# Altium PCB Z1.PcbDoc (part 1 of 2)
Units mm, origin at the board's own origin, x right, y up, seen from the top; angles counter-clockwise.
Board outline 56.7 x 34.49 mm, 4 copper layers (Top Layer, MidLayer1, MidLayer2, Bottom Layer), stack 1 mm thick; 106 components, 129 nets, 520 pads, 189 vias.
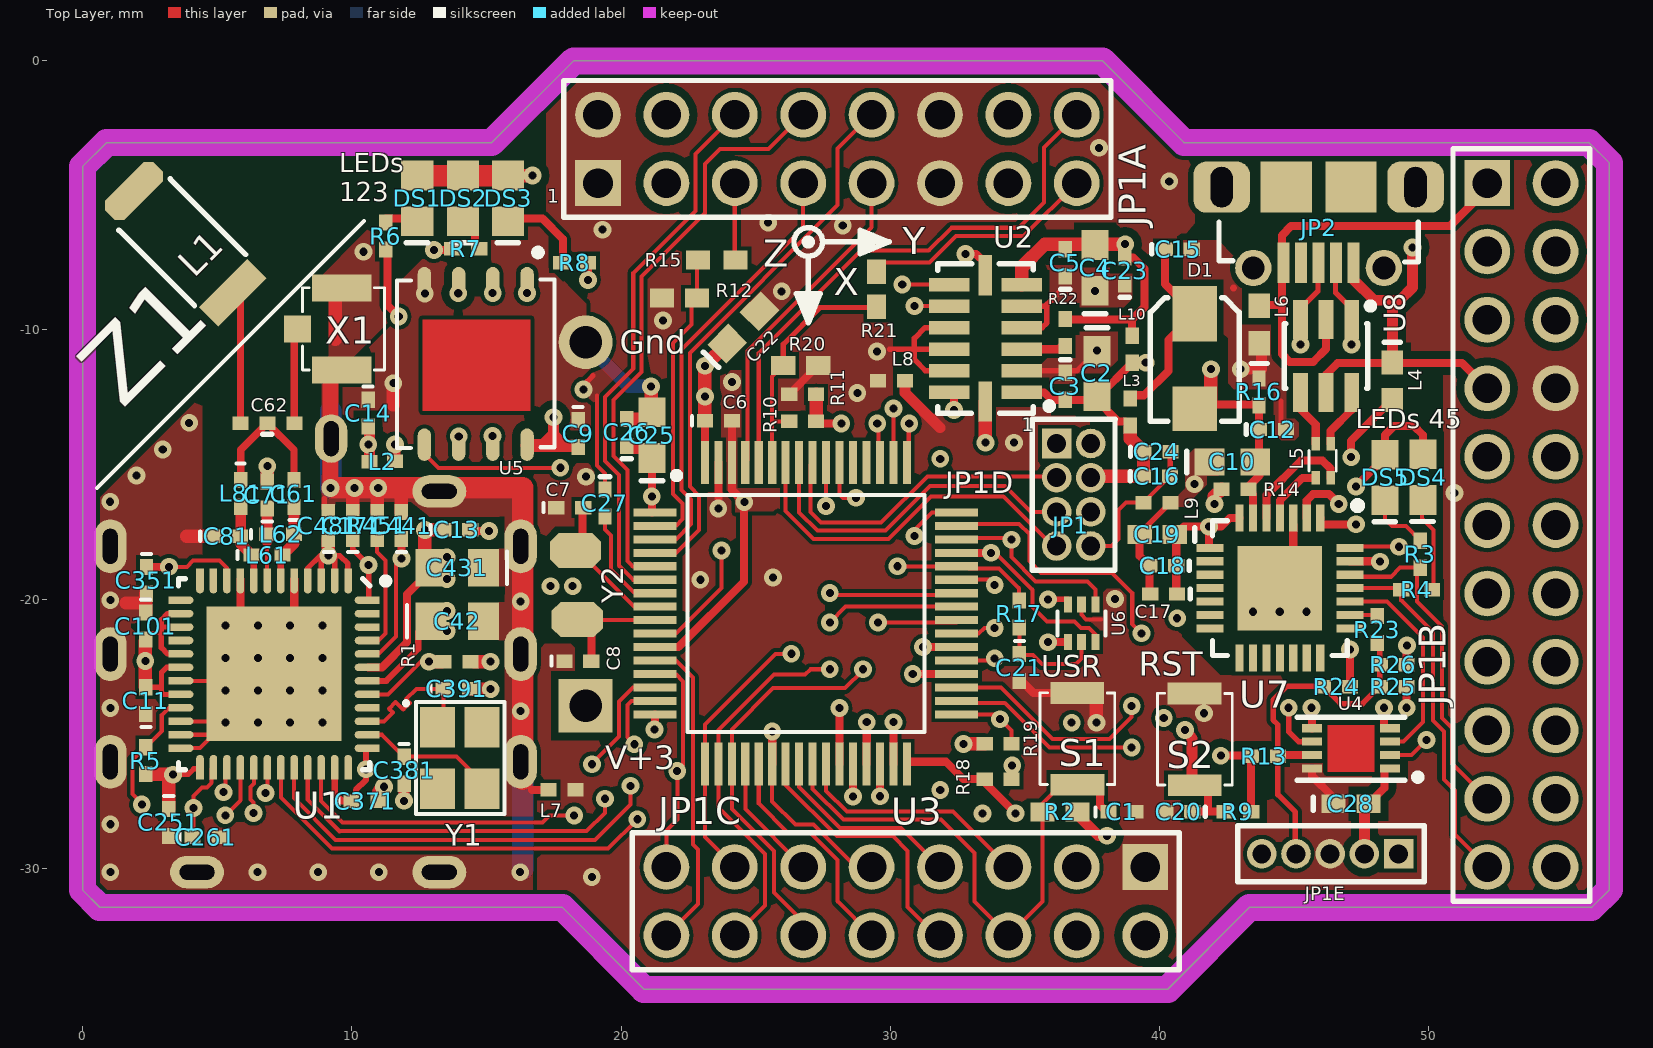
[diagram p0: Top Layer view]
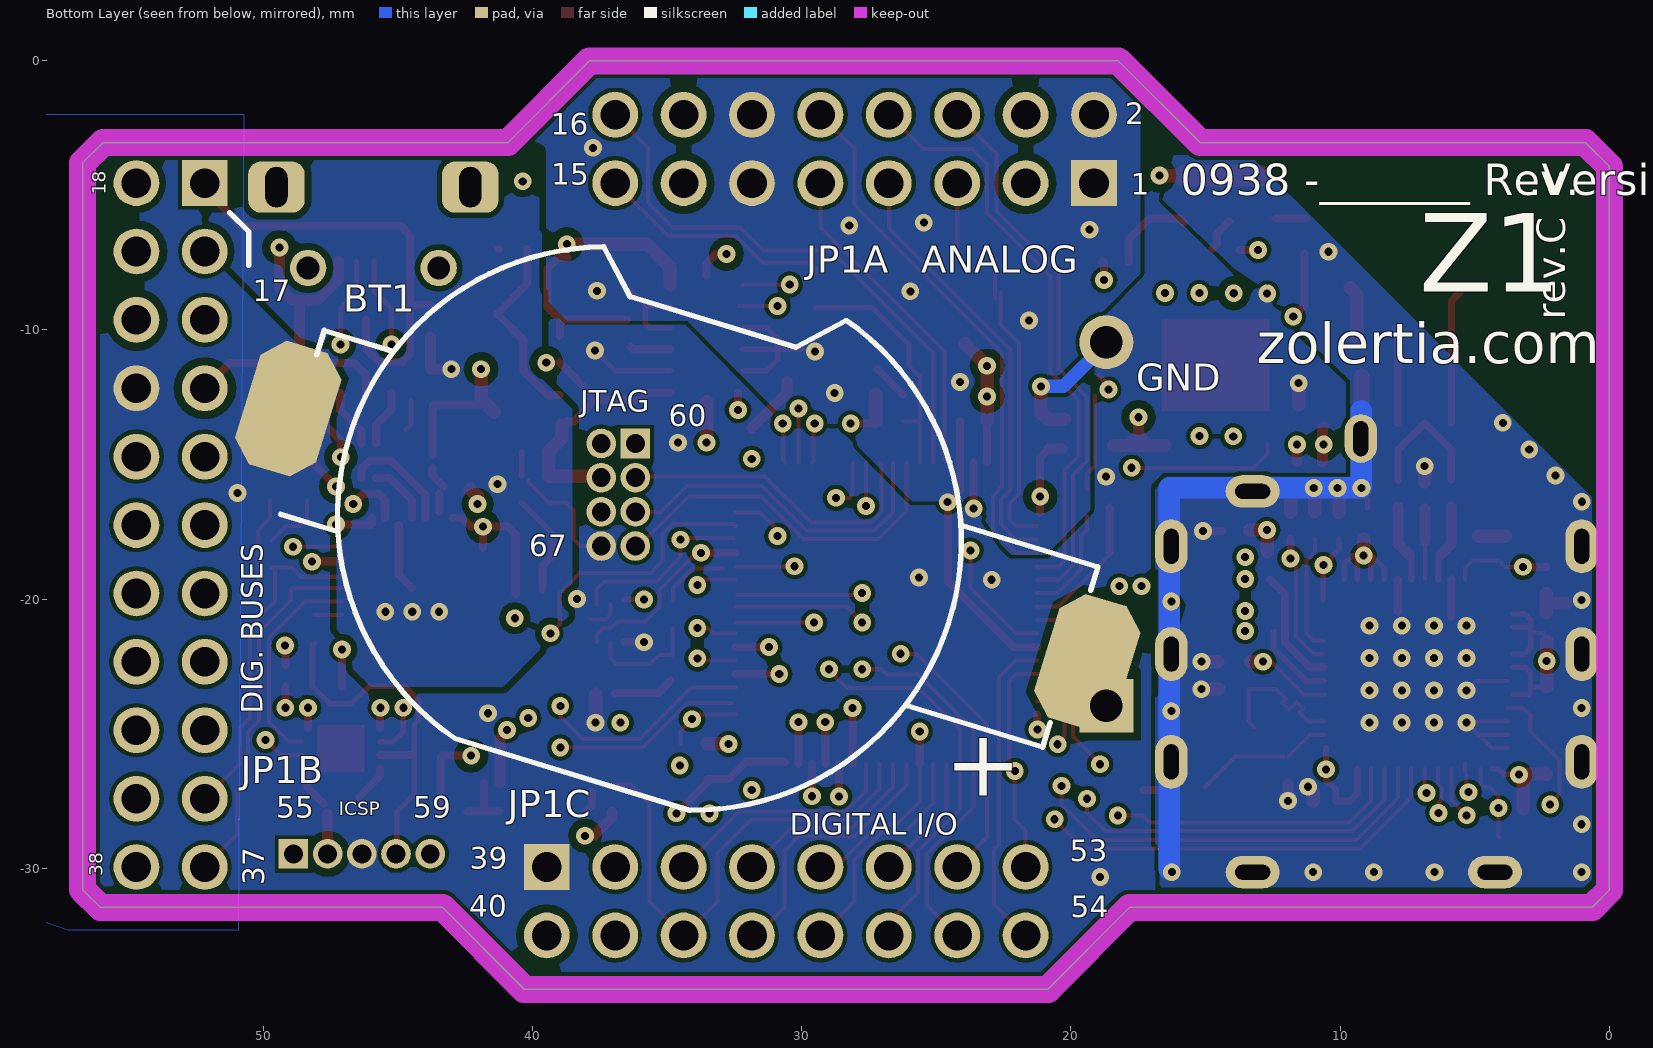
[diagram p1: Bottom Layer view, seen from below]
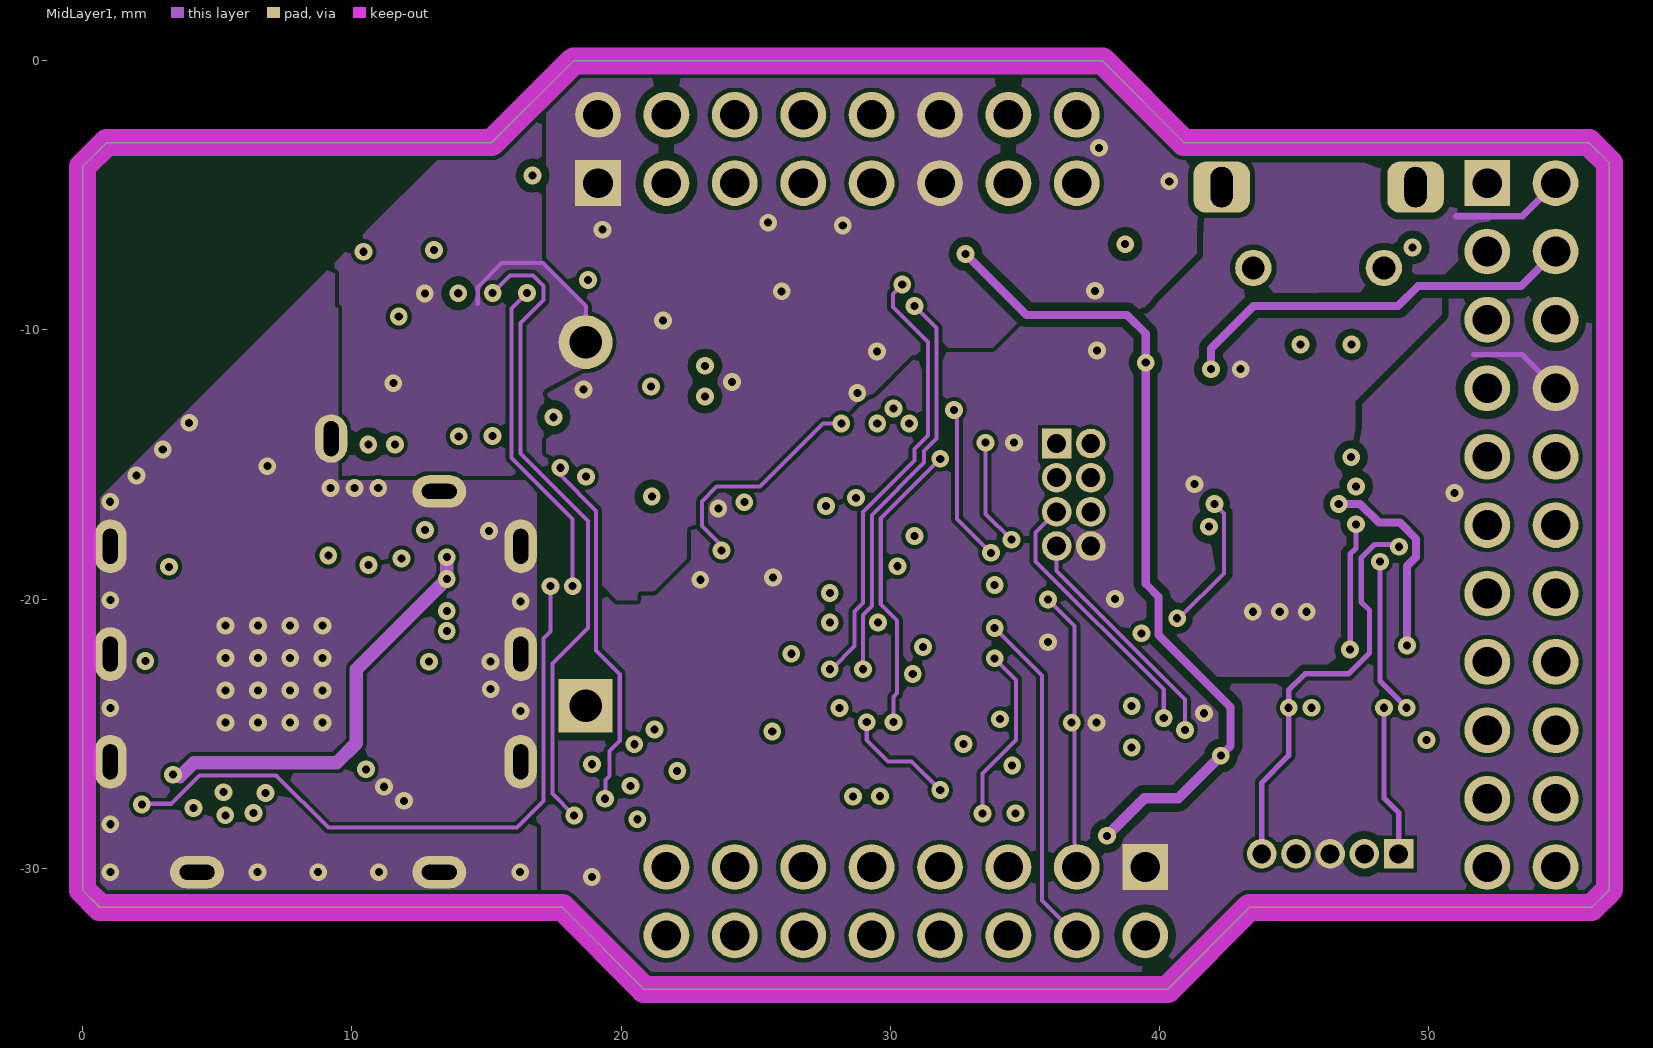
[diagram p2: MidLayer1]
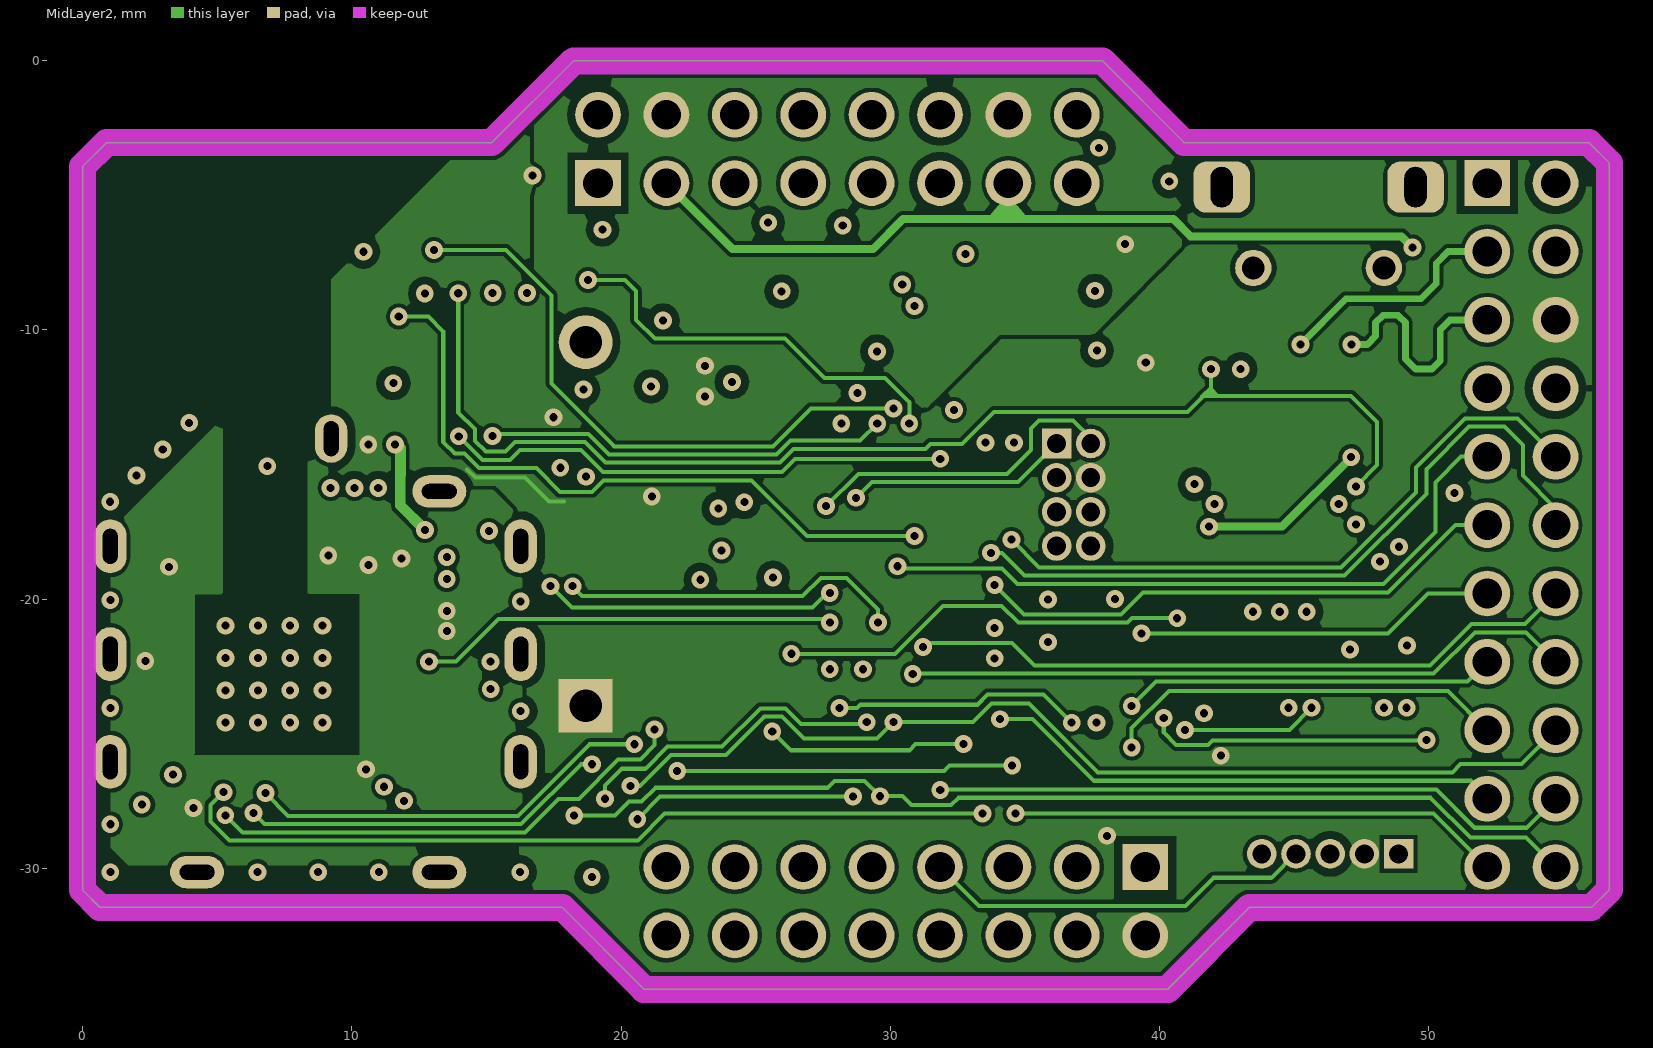
[diagram p3: MidLayer2]

## Layer stack, top to bottom
Top Layer: signal copper 0.035
Dielectric: prepreg 0.18, FR-4, Dk 4.8
MidLayer1: signal copper 0.035
Dielectric: core 0.5, FR-4, Dk 4.8
MidLayer2: signal copper 0.035
Dielectric: prepreg 0.18, FR-4, Dk 4.8
Bottom Layer: signal copper 0.035

## Board outline
0,-30.798 0.64,-31.438 0.63,-31.448 17.822,-31.448 20.84,-34.478 20.84,-34.488 40.3,-34.488 43.334,-31.442 43.334,-31.448 56.03,-31.448 56.035,-31.453 56.7,-30.788 56.7,-3.808 55.932,-3.04 55.925,-3.048 40.893,-3.048 40.901,-3.039 37.87,-0.008 18.256,-0.008 18.247,0.001 15.189,-3.048 0.87,-3.048 0.88,-3.058 0,-3.938 0,-5.704

## Design rules (kind name [scope] priority, off if disabled: settings)
AcuteAngle [All] p1: minimum=4.50000000000000E+0001
Clearance "JP2-2 Clearance constraint" [(ObjectKind = 'Pad') And (Layer = 'MultiLayer') And (Component = 'JP2') And (Name = 'JP2-7')] p1: gap=0.2
Clearance "KeppOutLayer Line Constraint" [(ObjectKind = 'Track') And (Layer = 'KeepOutLayer') And (X1 = '40.90138') And (Y1 = '-3.03938') And (X2 = '55.93138') And (Y2 = '-3.03938')] p2: gap=0.15
Clearance Clearance_1 [(ObjectKind = 'Pad') And (Net = 'DGND') And (Name = 'L9-2') OR (ObjectKind = 'Pad') And (Component = 'C19') And (Name = 'C19-1') vs (ObjectKind = 'Track') And (Net = 'CPDGND') And (X1 = '39.2811') And (Y1 = '-17.5319') And (X2 = '40.4') And (Y2 = '-16.413')] p3: gap=0.15
Clearance "C16 and L9 Clearance with Track" [(ObjectKind = 'Pad') And (Layer = 'Top Layer') And (Net = 'D+3V') And (Component = 'C16') And (Name = 'C16-1') Or (ObjectKind = 'Pad') And (Net = 'CPDGND') And (Name = 'L9-1') vs (ObjectKind = 'Track') And (Layer = 'Top Layer') And (Net = 'DGND') And (X1 = '39.4') And (Y1 = '-16.413') And (X2 = '40.156') And (Y2 = '-15.657')] p4: gap=0.15
Clearance "L9 Rules" [(ObjectKind = 'Pad') And (Name = 'L9-2') vs (ObjectKind = 'Pad') And (Name = 'L9-1')] p5: gap=0.15
Clearance "CP2102 - Clearance" [(Net = 'NetL5_3') OR (Net = 'CPRI') vs Net = 'CPDGND'] p6: gap=0.15
Clearance "U3 - Betwwen A+3V and AGND" [(ObjectKind = 'Pad') And (Layer = 'Top Layer') And (Net = 'ADC+3V') And (Component = 'U3') And (Name = 'U3-64')  OR (ObjectKind = 'Track') And (Layer = 'Top Layer') And (Net = 'ADC+3V') And (X1 = '23.11') And (Y1 = '-14.92901') And (X2 = '23.112') And (Y2 = '-13.378') And (Width = '0.3') vs (ObjectKind = 'Pad') And (Layer = 'Top Layer') And (Net = 'DGND') And (Component = 'U3') And (Name = 'U3-63')  OR (ObjectKind = 'Track') And (Layer = 'Top Layer') And (Net = 'DGND') And (X1 = '23.61') And (Y1 = '-16.638') And (X2 = '23.61') And (Y2 = '-14.92901') And (Width = '0.3')] p7: gap=0.15
Clearance "Between JP1-PIC DGND-D+3V" [(ObjectKind = 'Pad') And (Layer = 'MultiLayer') And (Net = 'DGND') And (Component = 'JP1') And (Name = 'JP1-57') vs (ObjectKind = 'Pad') And (Layer = 'MultiLayer') And (Net = 'D+3V') And (Component = 'JP1') And (Name = 'JP1-56')] p8: gap=0.15
Clearance "Between A+5V,ADC+3V,D+3V and DGOND,ADCGND,CPGND" [InNet('D+3V') OR InNet('D+5V') OR  InNet('USB+5V') OR InNet('CPD+3.3V') OR InNet('ADC+3V') OR InNet('DP+5V') vs InNet('DGND') OR InNet('DRFGND') OR InNet('CPDGND') OR InNet('USBGND') OR InNet('ADCGND')] p9: gap=0.3
Clearance "In Component C9 to ADCGND" [(InComponent('C9-2') AND InNet('D+3V')) vs InNet(ADCGND) And OnLayer(OnTop)] p10: gap=0.15
Clearance "Between D+1.8 and RFGND" [InNet('D+1.8V') vs InNet('RFGND')] p11: gap=0.2
Clearance "In Power Lines and DGND" [(InNetClass('Power Lines') AND OnLayer('Top Layer')) vs InNet('DGND') AND InNet('AGND') AND InNet('CPGND')] p12: gap=0.3
Clearance "Belong CR2032" [(HasFootprint('CR2032 - 796136-1'))] p13: gap=0.254
Clearance Poly_TOP_DGND [InNet('DGND') vs (HasFootprint('ABS07-32.768KHZ-7-T'))] p14: gap=0.254
Clearance "CPD_GND with All other points" [InNet('CPDGND')] p15: gap=0.254
Clearance [All] p16: gap=0.15
ComponentClearance [All] p1: gap=-100 collisioncheckmode=3 verticalgap=-100 showdistances=FALSE
DiffPairsRouting "USB Net N_P" [InNet('D_P')] p1: maxlimit=5 minlimit=0.15 mostfreqgap=0.254 maxuncoupledlength=12.7
DiffPairsRouting "USB Net D_N" [InNet('D_N')] p2: maxlimit=5 minlimit=0.15 mostfreqgap=0.2 maxuncoupledlength=12.7
DiffPairsRouting "RF Net RF_P" [InNet('RF_P')] p3: maxlimit=0.5 minlimit=0.15 mostfreqgap=0.254 toplayer_prefgap=0.2 midlayer1_mingap=0.254 midlayer1_maxgap=0.254 midlayer2_mingap=0.254 midlayer2_maxgap=0.254 bottomlayer_prefgap=0.2 maxuncoupledlength=12.7
DiffPairsRouting "RF Net RF_N" [InNet('RF_N')] p4: maxlimit=0.5 minlimit=0.15 mostfreqgap=0.254 toplayer_prefgap=0.2 midlayer1_mingap=0.254 midlayer1_maxgap=0.254 midlayer2_mingap=0.254 midlayer2_maxgap=0.254 bottomlayer_prefgap=0.2 maxuncoupledlength=12.7
DiffPairsRouting "XTAL32K Net XOSC16_P" [InNet('XOSC16_P')] p5: maxlimit=0.5 minlimit=0.15 mostfreqgap=0.254 toplayer_prefgap=0.2 midlayer1_mingap=0.254 midlayer1_maxgap=0.254 midlayer2_mingap=0.254 midlayer2_maxgap=0.254 bottomlayer_prefgap=0.2 maxuncoupledlength=12.7
DiffPairsRouting "XTAL32K Net XOSC16_N" [InNet('XOSC16_N')] p6: maxlimit=0.5 minlimit=0.15 mostfreqgap=0.254 toplayer_prefgap=0.2 midlayer1_mingap=0.254 midlayer1_maxgap=0.254 midlayer2_mingap=0.254 midlayer2_maxgap=0.254 bottomlayer_prefgap=0.2 maxuncoupledlength=12.7
DiffPairsRouting [All] p7: maxlimit=5 minlimit=0.15 mostfreqgap=0.2 maxuncoupledlength=12.7
HoleSize [All] p1: absolutevalues=TRUE maxlimit=2.54 minlimit=0.025 maxpercent=80.000 minpercent=20.000
LayerPairs [All] p1: enforce=FALSE
Length "InNet('D_N') Or InNet('D_P')_1" [InNet('D_N') Or InNet('D_P')] p1: maxlimit=12.283 minlimit=0
Length "InNet('D_N') Or InNet('D_P')" [InNet('D_N') Or InNet('D_P')] p2: maxlimit=12.283 minlimit=0
MinimumAnnularRing [All] p1: minimumring=0.18
PlaneClearance [All] p1: clearance=0.35
PlaneConnect "Schematic Power Plane Connect Style" [InNet('USB+5V')] p1: planeconnectstyle=Relief reliefexpansion=0.4 reliefentries=4 reliefconductorwidth=0.2 reliefairgap=0.2
PlaneConnect [All] p2: planeconnectstyle=Relief reliefexpansion=0.3 reliefentries=4 reliefconductorwidth=0.2 reliefairgap=0.2
PolygonConnect [All] p1: connectstyle=Direct reliefconductorwidth=0.2 reliefentries=4 polygonreliefangle="90 Angle"
RoutingCorners [All] p1: cornerstyle=45-Degree minsetback=1.27 maxsetback=1.27
RoutingPriority [All] p1: routingpriority=1
RoutingVias [All] p1: holewidth=0.3 width=0.66 viastyle="Through Hole" minholewidth=0.3 minwidth=0.3 maxholewidth=1 maxwidth=1
ShortCircuit [OnLayer('Keep-Out Layer')] p1: allowed=TRUE
SolderMaskExpansion MSP430_Expansion [(InComponent('U3'))] p1: expansion=0.12
SolderMaskExpansion PIC_Expansion [(InComponent('U4'))] p2: expansion=0.12
SolderMaskExpansion CP2102_Expansion [(InComponent('U7'))] p3: expansion=0.12
SolderMaskExpansion CC2420_Expansion [(InComponent('U1'))] p4: expansion=0.12
SolderMaskExpansion [All] p5: expansion=0.1
TestPointUsage [All] p1: valid=0 allowmultiple=FALSE
Testpoint [All] p1: side=9 testpointundercomponent=TRUE minsize=1 maxsize=2.54 preferedsize=1.524 minholesize=0 maxholesize=1.016 preferedholesize=0.813 testpointgrid=0 style=308 order=0123456789
Width "Schematic Width Constraint_6" [InNet('D_P')] p1: maxlimit=0.85 minlimit=0.15 preferedwidth=0.2
Width "Schematic Width Constraint_4" [InNet('D_N')] p2: maxlimit=0.8 minlimit=0.15 preferedwidth=0.2
Width "Schematic Width Constraint_2" [InNet('CERAMIC ANTENNA')] p3: maxlimit=3 minlimit=0.01 preferedwidth=0.254 impedancedriven=TRUE minimp=50.000000 maximp=50.000000 favimp=50.000000
Width "Schematic Width Constraint_3" [InNet('U.FL ANTENNA')] p4: maxlimit=3 minlimit=0.01 preferedwidth=0.254 impedancedriven=TRUE minimp=50.000000 maximp=50.000000 favimp=50.000000
Width "Schematic Width Constraint_5" [InNet('NetC61_2')] p5: maxlimit=3 minlimit=0.01 preferedwidth=0.254 impedancedriven=TRUE minimp=50.000000 maximp=50.000000 favimp=50.000000
Width "Net D+3.3V" [InNet('D+3.3V')] p6: maxlimit=2 minlimit=0.1 preferedwidth=0.5
Width "Schematic Width Constraint" [InNet('USB+5V')] p7: maxlimit=0.4 minlimit=0.3 preferedwidth=0.3
Width "Schematic Width Constraint_1" [InNet('DP+5V')] p8: maxlimit=1 minlimit=0.3 preferedwidth=0.3
Width [All] p9: maxlimit=5 minlimit=0.15 preferedwidth=0.2
10 further rules are at their usual default settings.

## Classes and differential pairs
net class X1_Nets: DRFGND "U.FL ANTENNA"
net class U2_Nets: ADC+3V ADCGND D+3V DGND I2C.SCL I2C.SDA INT1 INT2 NetR22_1
net class R451_Nets: DRFGND NetR451_1
net class R22_Nets: ADC+3V NetR22_1
net class R20_Nets: AD_0 ADCGND
net class R16_Nets: CPD+3.3V CPDGND
net class R13_Nets: D+3V GP0/ICSPDAT
net class R12_Nets: AD_3 ADCGND
net class R11_Nets: ADCGND VEREF+/DAC0
net class R9_Nets: D+3V GP2/T0CKI
net class R5_Nets: DRF+3V P4.6/TB6
net class R2_Nets: D+3V P2.5/ROSC/CA5
net class R1_Nets: DRFGND P4.5/TB5
net class L10_Nets: ADC+3V D+3V
net class L9_Nets: CPDGND DGND
net class L8_Nets: ADCGND DGND
net class L7_Nets: DGND DRFGND
net class L6_Nets: CPDGND USBGND
net class L3_Nets: D+3V NetC15_1
net class L2_Nets: D+3V DRF+3V
net class DS3_Nets: D+3V NetDS3_2
net class DS2_Nets: D+3V NetDS2_2
net class DS1_Nets: D+3V NetDS1_2
net class C481_Nets: D+1.8V DRFGND
net class C441_Nets: D+1.8V DRFGND
net class C431_Nets: DRF+3V DRFGND
net class C391_Nets: DRFGND XOSC16_N
net class C381_Nets: DRFGND XOSC16_P
net class C371_Nets: D+1.8V DRFGND
net class C351_Nets: D+1.8V DRFGND
net class C261_Nets: D+1.8V DRFGND
net class C251_Nets: DRF+3V DRFGND
net class C171_Nets: D+1.8V DRFGND
net class C101_Nets: D+1.8V DRFGND
net class C81_Nets: DRFGND RF_N
net class C71_Nets: DRFGND NetC71_1
net class C42_Nets: D+1.8V DRFGND
net class C28_Nets: D+3V DGND
net class C27_Nets: ADCGND VREF+
net class C26_Nets: D+3V DGND
net class C25_Nets: D+3V DGND
net class C24_Nets: D+3V DGND
net class C23_Nets: ADC+3V ADCGND
net class C22_Nets: ADC+3V ADCGND
net class C19_Nets: CPDGND DP+5V
net class C18_Nets: CPDGND DP+5V
net class C17_Nets: CPDGND DP+5V
net class C16_Nets: D+3V DGND
net class C15_Nets: CPDGND NetC15_1
net class C14_Nets: D+3V DGND
net class C13_Nets: DRF+3V DRFGND
net class C12_Nets: CPD+3.3V CPDGND
net class C11_Nets: D+1.8V DRFGND
net class C10_Nets: CPD+3.3V CPDGND
net class C9_Nets: D+3V DGND
net class C6_Nets: ADC+3V ADCGND
net class C5_Nets: ADC+3V ADCGND
net class C4_Nets: ADC+3V ADCGND
net class C3_Nets: D+3V DGND
net class C2_Nets: D+3V DGND
net class BT1_Nets: D+3V DGND
net class L1_Nets: "CERAMIC ANTENNA" NetL1_2
component class U_memory: C9 U5
net class R4_Nets: CPRXD NetDS4_2
net class DS5_Nets: CPD+3.3V NetDS5_2
net class UART0: CPRXD CPTXD
net class U4_Nets: CPDTR CPRTS D+3V DGND GP0/ICSPDAT GP2/T0CKI GP3/M\C\L\R\/VPP GP5/OSC1/CLKIN
net class R19_Nets: BSL_RX CPTXD
net class R18_Nets: BSL_TX CPRXD
net class C61_Nets: NetC61_2 RF_P
net class L61_Nets: RF_N RF_P
net class L62_Nets: NetC71_1 RF_P
net class L81_Nets: NetC61_2 RF_N
net class S2_Nets: DGND GP2/T0CKI
net class C20_Nets: DGND GP2/T0CKI
component class U_PIC_BSL: C28 U4
component class "U_USB Interface": C10 C12 C17 C18 C19 DS4 DS5 DS? L4 L5 L6 R3 R4 U7 U8
component class U_RF: C11 C42 C61 C62 C71 C81 C101 C171 C251 C261 C351 C371 C381 C391 C431 C441 C481 L61 L62 L81 R1 R5 R451 U1 Y1
component class "Main Board": BT1 JP1 JP2 JP4 JP5 JP6 JP? JPXX L1 R12 R15 R18 R19 R20 R21 R23 R24 R25 R26 R27 SD1 T1 T2 X1 X2 X?
component class U_LED: DS1 DS2 DS3 R6 R7 R8
component class U_MCU: C1 C6 C7 C8 C20 C22 C25 C26 C27 R2 R9 R10 R11 R13 R14 S1 S2 U3 Y2
component class "U_Power Supply": C13 C14 C15 C16 C23 C24 D1 L2 L3 L7 L8 L9 L10 R16
component class U_Temp: C21 R17 U6
net class C1_Nets: DGND P2.5/ROSC/CA5
net class C7_Nets: DGND XIN
net class C8_Nets: DGND XOUT
net class C21_Nets: DGND NetC21_1
net class D1_Nets: CPD+3.3V NetC15_1
net class I2C: I2C.SCL I2C.SDA
net class JP2_Nets: D_N D_P NCID USB+5V USBGND USBNC0 USBNC1
net class L4_Nets: DP+5V USB+5V
net class L5_Nets: NetL5_1 NetL5_2 NetL5_3 NetL5_4
net class "Power Lines": USB+5V
net class R17_Nets: NetC21_1 P5.0/UCB1STE/UCA1CLK
net class S1_Nets: DGND P2.5/ROSC/CA5
net class U1_Nets: CC11 CC12 CC13 CC16 CC36 CC40 CC46 CC47 D+1.8V DRF+3V DRFGND NetC71_1 NetR1_2 NetR451_1 P1.2/TA1 P1.3/TA2 P1.4/SMCLK P3.0/UCB0STE/UCA0CLK P3.1/UCB0SIMO/UCB0SDA P3.2/UCB0SOMI/UCB0SCL P3.3/UCB0CLK/UCA0STE P4.1/TB1 P4.5/TB5 P4.6/TB6 RF_N RF_P XOSC16_N XOSC16_P
net class U5_Nets: CPD+3.3V D+3V DGND FLASH_CS FLASH_HOLD P3.1/UCB0SIMO/UCB0SDA P3.2/UCB0SOMI/UCB0SCL P3.3/UCB0CLK/UCA0STE
net class U6_Nets: ALERT DGND I2C.SCL I2C.SDA NetC21_1
net class U7_Nets: CPCTS CPD+3.3V CPDCD CPDGND CPDSR CPDTR CPNC9 CPNC10 CPNC11 CPNC12 CPNC13 CPNC14 CPNC15 CPNC16 CPNC17 CPNC18 CPNC19 CPNC20 CPNC21 CPNC22 CPRI CPRTS CPRXD CPTXD DP+5V NetL5_2 NetL5_3
net class U8_Nets: D_N D_P NetL5_1 NetL5_4 USB+5V USBGND
net class Y2_Nets: XIN XOUT
net class R8_Nets: LED3 NetDS3_2
net class R7_Nets: LED2 NetDS2_2
net class R6_Nets: LED1 NetDS1_2
component class U_Accelerometer: C2 C3 C4 C5 R22 U2
net class AD_[0..7]: AD_0 AD_1 AD_2 AD_3 AD_4 AD_5 AD_6 AD_7
net class JP: JP.INT_P1.0/CAOUT JP.P1.5/TA0 JP.P2.0/ACLK/CA2 JP.P2.1/TAINCLK/CA3 JP.P2.3/CA0/TA1 JP.P2.6/ADC12CLK/DMAEO/CA6 JP.P4.0/TB0 JP.P4.2/TB2 JP.P4.3/TB3 JP.P4.7/TBCLK JP.P5.3/UCB1CLK/UCA1STE
net class JTAG: GP5/OSC1/CLKIN JTAG.TDI JTAG.TDO JTAG.TMS
net class LED[1..3]: LED1 LED2 LED3
net class R10_Nets: AD_0 VEREF+/DAC0
net class R14_Nets: CPD+3.3V JP.P1.5/TA0
net class SPI: P3.1/UCB0SIMO/UCB0SDA P3.2/UCB0SOMI/UCB0SCL P3.3/UCB0CLK/UCA0STE
net class U3_Nets: AD_0 AD_1 AD_2 AD_3 AD_4 AD_5 AD_6 AD_7 ADC+3V ADCGND ALERT BSL_RX BSL_TX CPRXD CPTXD D+3V DGND FLASH_CS FLASH_HOLD GP0/ICSPDAT GP2/T0CKI GP5/OSC1/CLKIN I2C.SCL I2C.SDA INT1 INT2 JP.INT_P1.0/CAOUT JP.P1.5/TA0 JP.P2.0/ACLK/CA2 JP.P2.1/TAINCLK/CA3 JP.P2.3/CA0/TA1 JP.P2.6/ADC12CLK/DMAEO/CA6 JP.P4.0/TB0 JP.P4.2/TB2 JP.P4.3/TB3 JP.P4.7/TBCLK JP.P5.3/UCB1CLK/UCA1STE JTAG.TDI JTAG.TDO JTAG.TMS LED1 LED2 LED3 P1.2/TA1 P1.3/TA2 P1.4/SMCLK P2.5/ROSC/CA5 P3.0/UCB0STE/UCA0CLK P3.1/UCB0SIMO/UCB0SDA P3.2/UCB0SOMI/UCB0SCL P3.3/UCB0CLK/UCA0STE P4.1/TB1 P4.5/TB5 P4.6/TB6 P5.0/UCB1STE/UCA1CLK UART1.RX UART1.TX VEREF+/DAC0 VREF+ XIN XOUT XT2IN XT2OUT
net class UART1: UART1.RX UART1.TX
net class DS4_Nets: CPD+3.3V NetDS4_2
net class R3_Nets: CPTXD NetDS5_2
net class C62_Nets: "CERAMIC ANTENNA" NetC61_2 "U.FL ANTENNA"
net class R23_Nets: CPCTS GP0/ICSPDAT
net class R24_Nets: CPDCD GP0/ICSPDAT
net class R25_Nets: CPDSR GP0/ICSPDAT
net class R26_Nets: CPRI GP0/ICSPDAT
net class R21_Nets: AD_0 NetJP1_15
net class R15_Nets: AD_3 NetJP1_5
net class JP1_Nets: AD_1 AD_2 AD_4 AD_5 AD_6 AD_7 ADC+3V ADCGND ALERT BSL_RX BSL_TX CPD+3.3V CPDGND CPDTR CPRXD CPTXD D+3V D_N D_P DGND GP0/ICSPDAT GP2/T0CKI GP3/M\C\L\R\/VPP GP5/OSC1/CLKIN I2C.SCL I2C.SDA INT1 INT2 JP1NC6 JP.INT_P1.0/CAOUT JP.P1.5/TA0 JP.P2.0/ACLK/CA2 JP.P2.1/TAINCLK/CA3 JP.P2.3/CA0/TA1 JP.P2.6/ADC12CLK/DMAEO/CA6 JP.P4.0/TB0 JP.P4.2/TB2 JP.P4.3/TB3 JP.P4.7/TBCLK JP.P5.3/UCB1CLK/UCA1STE JTAG.TDI JTAG.TDO JTAG.TMS NetJP1_5 NetJP1_15 P2.5/ROSC/CA5 P3.1/UCB0SIMO/UCB0SDA P3.2/UCB0SOMI/UCB0SCL P3.3/UCB0CLK/UCA0STE P5.0/UCB1STE/UCA1CLK UART1.RX UART1.TX USB+5V USBGND
net class Y1_Nets: NetY1_2 NetY1_4 XOSC16_N XOSC16_P
differential pair D: +D_P -D_N
differential pair XOSC16: +XOSC16_P -XOSC16_N
differential pair RF: +RF_P -RF_N

## Components (designator, comment, footprint, x,y, rotation, side; value= is the part's Value field where it differs from the comment)
BT1 "CR2032" "CR2032 - 796136-1" 34.36,-17.768 r17 bottom locked
C1 "Cap Semi" CC-0402-AL 38.6,-27.9 r0 top
C2 "Cap Semi" CC1608-0603 37.67,-11.618 r270 top
C3 "Cap Semi" CC-0402-AL 36.5,-12.1 r270 top
C4 "Cap Semi" CC1608-0603 37.6,-7.7 r90 top
C5 "Cap Semi" CC-0402-AL 36.5,-7.5 r90 top
C6 "Cap Semi" CC-0402-AL 23.62,-13.378 r0 top
C7 "Cap Semi" CC-0402-AL 18.1,-16.6 r0 top
C8 "Cap Semi" CC-0402-AL 18.4,-22.3 r0 top
C9 "Cap Semi" CC-0402-AL 18.4,-13.861 r270 top
C10 "Cap Semi" CC1608-0603 42.7,-14.9 r0 top
C11 "Cap Semi" CC-0402-AL 2.352,-23.76 r90 top
C12 "Cap Semi" CC-0402-AL 44.2,-13.7 r0 top
C13 "Cap Semi" CC-0402-AL 13.906,-17.418 r0 top
C14 "Cap Semi" CC-0402-AL 10.6,-13.1 r270 top
C15 "Cap Semi" CC-0402-AL 40.7,-7 r0 top
C16 "Cap Semi" CC-0402-AL 39.89,-15.432 r0 top
C17 "Cap Semi" CC-0402-AL 40.14,-19.808 r180 top
C18 "Cap Semi" CC-0402-AL 40.106,-18.753 r180 top
C19 "USB bus decoupling" CC1005-0402 39.906,-17.598 r180 top
C20 "Cap Semi" CC-0402-AL 40.7,-27.9 r180 top
C21 "Cap Semi" CC-0402-AL 34.79,-22.548 r270 top
C22 "Cap Semi" CC1608-0603 24.54,-9.908 r45 top
C23 "Cap Semi" CC-0402-AL 38.7,-7.8 r90 top
C24 "Cap Semi" CC-0402-AL 39.906,-14.532 r0 top
C25 "Cap Semi" CC1608-0603 21.14,-13.908 r90 top
C26 "Cap Semi" CC-0402-AL 20.2,-13.798 r90 top
C27 "Cap Semi" CC-0402-AL 19.4,-16.438 r270 top
C28 "Cap Semi" CC1005-0402 47.1,-27.6 r0 top
C42 "Cap Semi" CC2013-0805 13.906,-20.822 r0 top
C61 "Cap Semi" CC-0402-AL 7.851,-16.07 r90 top
C62 "Bilateral Switch Capacitor" "Dual Capacitor Switch" 6.84,-13.508 r180 top
C71 "Cap Semi" CC-0402-AL 6.861,-16.13 r90 top
C81 "Cap Semi" CC-0402-AL 5.36,-17.66 r0 top
C101 "Cap Semi" CC-0402-AL 2.34,-21.008 r270 top
C171 "Cap Semi" CC-0402-AL 10.032,-17.26 r90 top
C251 "Cap Semi" CC-0402-AL 3.2,-28.298 r270 top
C261 "Cap Semi" CC-0402-AL 4.59,-28.848 r0 top
C351 "Cap Semi" CC-0402-AL 2.373,-19.308 r270 top
C371 "Cap Semi" CC-0402-AL 10.5,-27.498 r0 top
C381 "Cap Semi" CC-0402-AL 11.941,-26.36 r270 top
C391 "Cap Semi" CC-0402-AL 13.906,-23.332 r0 top
C431 "Cap Semi" CC2013-0805 13.906,-18.832 r180 top
C441 "Cap Semi" CC-0402-AL 11.841,-17.26 r90 top
C481 "Cap Semi" CC-0402-AL 9.127,-17.26 r90 top
D1 "D Schottky 2" STPS140A 41.3,-11.1 r90 top
DS1 "R" LED0603#1 12.43,-4.268 r270 top
DS2 "G" LED0603#1 14.13,-4.268 r270 top
DS3 "B" LED0603#1 15.8,-4.268 r270 top
DS4 "TXLed" LED0603#2 49.77,-14.618 r270 top
DS5 "RXLed" LED0603#2 48.37,-14.631 r270 top
JP1 "Z1 Expansion Connector" "Z1 Expansion Connectors_RC2" 37.44,-18.028 r0 top locked
JP2 "Micro USB 5 pins" ZX62D-B-5P8 45.9,-4.7 r180 top
L1 "Ceramic Antenna" "YAGEO - CAW431115300245" 5.57,-8.618 r135 top
L2 "Inductor" CR-0402-AL#1 11.1,-14.9 r0 top
L3 "Inductor" CR-0402-AL#2 38.9,-13.048 r270 top
L4 "Inductor" INDC1608-0603 48.64,-11.908 r270 top
L5 "DLP11SN900HL2L" inductor-4pins 46.07,-14.858 r270 top
L6 "Inductor" INDC1608-0603 43.7,-9.8 r90 top
L7 "Inductor" CR-0402-AL#2 17.8,-27.067 r180 top
L8 "Inductor" CR-0402-AL#2 30.04,-11.908 r0 top
L9 "Inductor" CR-0402-AL#2 39.9,-16.4 r180 top
L10 "Inductor" CR-0402-AL#2 38.97,-10.718 r270 top
L61 "Inductor" INDC1005-0402-ALT 6.85,-18.36 r0 top
L62 "Inductor" INDC1005-0402 7.351,-17.59 r0 top
L81 "Inductor" INDC1005-0402 5.871,-16.07 r270 top
R1 "Res Semi" CR-0402-AL#3 13.906,-22.322 r180 top
R2 "Res Semi" CR1005-0402#1 36.3,-27.9 r180 top
R3 "Res Semi" CR-0402-AL#2 49.67,-18.331 r270 top
R4 "Res Semi" CR-0402-AL#4 49.47,-19.631 r180 top
R5 "Res Semi" CR-0402-AL#3 2.352,-25.998 r90 top
R6 "Res Semi" CR-0402-AL#2 11.27,-6.518 r90 top
R7 "Res Semi" CR-0402-AL#2 14.23,-6.968 r180 top
R8 "Res Semi" CR-0402-AL#2 18.27,-7.518 r0 top
R9 "Res Semi" CR-0402-AL#2 42.9,-27.9 r0 top
R10 "Res Semi" CR-0402-AL#2 26.74,-13.388 r180 top
R11 "Res Semi" CR-0402-AL#2 26.74,-12.408 r0 top
R12 "Res Semi" CR1005-0402#1 22.17,-8.818 r180 top
R13 "Res Semi" CR-0402-AL#2 43.89,-25.848 r0 top
R14 "Res Semi" CR-0402-AL#2 42.8,-15.9 r180 top
R15 "Res Semi" CR1005-0402#2 23.5,-7.4 r180 top
R16 "Res Semi" CR-0402-AL#2 43.7,-12.3 r90 top
R17 "Res Semi" CR-0402-AL#2 34.79,-20.548 r90 top
R18 "Res Semi" CR-0402-AL#2 34,-26.698 r0 top
R19 "Res Semi" CR-0402-AL#2 34,-25.358 r180 top
R20 "Res Semi" CR1005-0402#1 26.67,-11.318 r0 top
R21 "Res Semi" CR1005-0402#1 29.484,-8.493 r270 top
R22 "Res Semi" CR-0402-AL#2 36.5,-10.1 r90 top
R23 "Res Semi" CR-0402-AL#2 48.07,-21.131 r270 top
R24 "Res Semi" CR-0402-AL#2 46.57,-23.231 r180 top
R25 "Res Semi" CR-0402-AL#2 48.67,-23.231 r180 top
R26 "Res Semi" CR-0402-AL#2 48.67,-22.431 r180 top
R451 "Res Semi" CR-0402-AL#3 10.936,-17.26 r90 top
S1 "USR" B3U-1000P 36.94,-25.188 r90 top
S2 "RST" B3U-1000P 41.3,-25.207 r90 top
U1 "CC2420" QFN7X7-48 7.11,-22.785 r180 top
U2 "LIS302DLTR" "LGA-3x5x1 0.8 - 1.5" 34.87,-12.318 r180 top
U3 "MSP430F2617TPMR" F-QFP10x10-G64/N 26.86,-20.529 r0 top
U4 "8-Bit CMOS Microcontroller" "DFN 2x3x0.9mm" 47.1,-25.548 r180 top
U5 "MEM SPI" VFQFPN8 14.6,-11.263 r270 top
U6 "TMP102." SOT-TMP102 37.1,-20.898 r180 top
U7 "CP2102" MLP-28 46.96,-22.092 r270 top locked
U8 "ESD protection" SO-G6/E2.4 46.18,-10.968 r180 top
X1 "U.FL RF Connector" U.FL 8.8,-9.963 r270 top
Y1 "XTAL 4pins" "NX3225SA- 16.000000Hhz-B3" 14.84,-24.76 r270 top
Y2 "32K" ABS07-32.768KHZ-7-T 18.37,-18.258 r270 top

## Footprints (in the part's own frame and the unit in brackets; to place one, negate y for a bottom-side part, rotate by r counter-clockwise, add the part's x,y. Pads: shape width x height; smd on the part's side, far side on the other; paste and mask are expansions set on the pad)
ABS07-32.768KHZ-7-T [mm] "CRYSTAL 32.768KHZ 7PF SMD"
  oct 1.3x1.9 smd: 1(-0.061,-0.061) 2(2.5,0)
B3U-1000P [mm] "Ultra-small Tactile Switch for a 3x2.5mm body"
  rect 0.8x2 smd: 1(-1.703,-0.003) 2(1.703,0.003)
  silkscreen extent -1.7,-1.39 1.72,1.39
CC1005-0402 [mm] "Chip Capacitor; Body 1.0 x 0.5 mm (LxW typ)"
  rect 0.9x0.7 smd: 1(-0.65,0) 2(0.65,0)
  silkscreen extent -1.4,-0.25 -1.4,0.25
CC1608-0603 [mm] "Chip Capacitor; Body 1.6 x 0.8 mm (LxW typ)"
  rect 1.1x1 smd: 1(-0.85,0) 2(0.85,0)
  silkscreen extent -1.7,-0.4 -1.7,0.4
CC2013-0805 [mm] "Chip Capacitor; Body 2.0 x 1.3 mm (LxW typ)"
  rect 1.15x1.4 smd: 1(-0.975,0) 2(0.975,0)
  silkscreen extent -1.85,-0.6 -1.85,0.6
CC-0402-AL [mm]
  rect 0.6x0.5 smd: 1(-0.508,0) 2(0.492,0)
  silkscreen extent -0.99,-0.17 -0.99,0.17
CR1005-0402#1 [mm] "Chip Resistor; Body 1.1 x 0.5 mm (LxW typ)"
  rect 0.9x0.7 smd: 1(-0.65,0) 2(0.65,0)
CR1005-0402#2 [mm] "Chip Resistor; Body 1.1 x 0.5 mm (LxW typ)"
  rect 0.9x0.7 smd: 1(-0.75,0) 2(0.65,0)
"CR2032 - 796136-1" [mm] "BATTERY HOLDER SMD CR2032 Part Number: 796136-1"
  oct 3.15x4.8 smd: 1(-15.65,-0.018) 2(15.473,-0.331)
  silkscreen extent -15,-9.52 15.05,9.57
CR-0402-AL#1 [mm] "A alternativa and adjust 0402 footprint."
  rect 0.6x0.5 smd: 1(-0.45,0) 2(0.5,0.013)
CR-0402-AL#2 [mm] "A alternative and adjust 0402 footprint."
  rect 0.6x0.5 smd: 1(-0.5,0.013) 2(0.5,0.013)
CR-0402-AL#3 [mm] "Chip Resistor; Body 1.0 x 0.5 mm (LxW typ) Alternative footprint"
  rect 0.6x0.5 smd: 1(-0.5,0) 2(0.5,0)
CR-0402-AL#4 [mm] "A alternative and adjust 0402 footprint."
  rect 0.6x0.5 smd: 1(-0.64,0.013) 2(0.5,0.013)
"DFN 2x3x0.9mm" [mm] "8-Lead Plastic Dual Flat, No Lead Package (MC) - 2x3x0.9mm Body [DFN]"
  rect 0.75x0.3 smd: 1(-1.45,0.745) 2(-1.45,0.245) 3(-1.45,-0.255) 4(-1.45,-0.755) 5(1.45,-0.755) 6(1.45,-0.255) 7(1.45,0.245) 8(1.45,0.745)
  Top Layer region: -0.875,-0.881 0.875,-0.881 0.875,0.869 -0.875,0.869
  silkscreen extent -2.61,-1.17 2,1.19
"Dual Capacitor Switch" [mm] "Is two 0402 with a pad common."
  rect 0.6x0.5 smd: 1(-0.024,-0.043) 2(-1.024,-0.043) 3(0.976,-0.043)
  silkscreen extent -0.19,0.38 0.15,0.38
F-QFP10x10-G64/N [mm] "64-Pin Plastic Quad Flat Pack (TQFP)"
  rect 1.6x0.3 smd: 1(-5.6,3.75) 2(-5.6,3.25) 3(-5.6,2.75) 4(-5.6,2.25) 5(-5.6,1.75) 6(-5.6,1.25) 7(-5.6,0.75) 8(-5.6,0.25) 9(-5.6,-0.25) 10(-5.6,-0.75) 11(-5.6,-1.25) 12(-5.6,-1.75) 13(-5.6,-2.25) 14(-5.6,-2.75) 15(-5.6,-3.25) 16(-5.6,-3.75) 33(5.6,-3.75) 34(5.6,-3.25) 35(5.6,-2.75) 36(5.6,-2.25) 37(5.6,-1.75) 38(5.6,-1.25) 39(5.6,-0.75) 40(5.6,-0.25) 41(5.6,0.25) 42(5.6,0.75) 43(5.6,1.25) 44(5.6,1.75) 45(5.6,2.25) 46(5.6,2.75) 47(5.6,3.25) 48(5.6,3.75)
  rect 0.3x1.6 smd: 17(-3.75,-5.6) 18(-3.25,-5.6) 19(-2.75,-5.6) 20(-2.25,-5.6) 21(-1.75,-5.6) 22(-1.25,-5.6) 23(-0.75,-5.6) 24(-0.25,-5.6) 25(0.25,-5.6) 26(0.75,-5.6) 27(1.25,-5.6) 28(1.75,-5.6) 29(2.25,-5.6) 30(2.75,-5.6) 31(3.25,-5.6) 32(3.75,-5.6) 49(3.75,5.6) 50(3.25,5.6) 51(2.75,5.6) 52(2.25,5.6) 53(1.75,5.6) 54(1.25,5.6) 55(0.75,5.6) 56(0.25,5.6) 57(-0.25,5.6) 58(-0.75,5.6) 59(-1.25,5.6) 60(-1.75,5.6) 61(-2.25,5.6) 62(-2.75,5.6) 63(-3.25,5.6) 64(-3.75,5.6)
  silkscreen extent -4.93,-4.4 4.4,5.25
INDC1005-0402 [mm] "Chip Inductor; Body 1 x 0.5 mm (LxW typ)"
  rect 0.6x0.5 smd: 1(-0.5,0) 2(0.5,0)
  silkscreen extent -1.1,-0.15 -1.1,0.15
INDC1005-0402-ALT [mm] "Chip Inductor; Body 1 x 0.5 mm (LxW typ)"
  rect 0.6x0.5 smd: 1(-0.572,0) 2(0.572,0)
  silkscreen extent -1.1,-0.15 -1.1,0.15
INDC1608-0603 [mm] "Chip Inductor; Body 1.6 x 0.8 mm (LxW typ)"
  rect 0.9x0.8 smd: 1(-0.7,0) 2(0.7,0)
  silkscreen extent -1.45,-0.3 -1.45,0.3
inductor-4pins [mm] "chip common mode choke coils"
  rect 0.5x0.32 smd: 1(-0.635,0.275) 2(0.635,0.275) 3(0.635,-0.275) 4(-0.635,-0.275)
  silkscreen extent -0.38,-0.53 0.38,0.49
LED0603#1 [mm]
  rect 1.1x1.2 smd: 1(0,0) 2(1.7,0)
  silkscreen extent 2.5,-0.41 2.5,0.38
LED0603#2 [mm]
  rect 1.1x1 smd: 1(0,0) 2(1.7,0)
  silkscreen extent 2.5,-0.41 2.5,0.38
"LGA-3x5x1 0.8 - 1.5" [mm] "LGA 14 I/O. 3x5x1 Pitch 0.8 y 1.5mm de pad"
  rect 1.5x0.5 smd: 1(0,0) 2(0,-0.8) 3(0,-1.6) 4(0,-2.4) 5(0,-3.2) 6(0,-4) 8(2.686,-4) 9(2.686,-3.2) 10(2.686,-2.4) 11(2.686,-1.6) 12(2.686,-0.8) 13(2.686,0)
  rect 0.5x1.5 smd: 7(1.343,-4.342) 14(1.343,0.343)
  silkscreen extent -1.15,-4.77 3.11,0.78
MLP-28 [mm] "Compact 5 x 5 mm MLP-28 package from Silicon Labs"
  rect 1x0.3 smd: 1(-5.1,-1) 2(-5.1,-1.5) 3(-5.1,-2) 4(-5.1,-2.5) 5(-5.1,-3) 6(-5.1,-3.5) 7(-5.1,-4) 15(0.1,-4) 16(0.1,-3.5) 17(0.1,-3) 18(0.1,-2.5) 19(0.1,-2) 20(0.1,-1.5) 21(0.1,-1)
  rect 0.3x1 smd: 8(-4,-5.1) 9(-3.5,-5.1) 10(-3,-5.1) 11(-2.5,-5.1) 12(-2,-5.1) 13(-1.5,-5.1) 14(-1,-5.1) 22(-1,0.1) 23(-1.5,0.1) 24(-2,0.1) 25(-2.5,0.1) 26(-3,0.1) 27(-3.5,0.1) 28(-4,0.1)
  rect 3.15x3.15 smd: ""(-2.5,-2.5)
  Top Layer lines w0.3: -2.5,-2.5 -3,-2 -4.85,-2
  silkscreen extent -5,-5 0,0
"NX3225SA- 16.000000Hhz-B3" [mm] "CRYSTAL 16.000Mhz CHIPSET NAME31343  TYPE NX3225A APPLICATION BLUETOOTH"
  rect 1.5x1.3 smd: 1(0,-1.651) 2(2.286,-1.651) 3(2.286,0) 4(0,0)
  silkscreen extent -0.94,-2.83 3.23,0.83
QFN7X7-48 [mm] "Quad Flat No Lead; 48 Terminals; Body 7 x 7 mm; Pitch 0.5 mm"
  rect 5x5 smd: 0(0,-0.01)
  rect 0.28x0.8 smd: 1(-2.75,-3.515) 2(-2.25,-3.515) 3(-1.75,-3.515) 4(-1.25,-3.515) 5(-0.75,-3.515) 6(-0.25,-3.515) 7(0.25,-3.515) 8(0.75,-3.515) 9(1.25,-3.515) 10(1.75,-3.515) 11(2.25,-3.515) 12(2.75,-3.515) 25(2.75,3.515) 26(2.25,3.515) 27(1.75,3.515) 28(1.25,3.515) 29(0.75,3.515) 30(0.25,3.515) 31(-0.25,3.515) 32(-0.75,3.515) 33(-1.25,3.515) 34(-1.75,3.515) 35(-2.25,3.515) 36(-2.75,3.515)
  oval 0.28x0.66 smd: 1(-2.75,-3.325) 2(-2.25,-3.325) 3(-1.75,-3.325) 4(-1.25,-3.325) 5(-0.75,-3.325) 6(-0.25,-3.325) 7(0.25,-3.325) 8(0.75,-3.325) 9(1.25,-3.325) 10(1.75,-3.325) 11(2.25,-3.325) 12(2.75,-3.325) 25(2.75,3.325) 26(2.25,3.325) 27(1.75,3.325) 28(1.25,3.325) 29(0.75,3.325) 30(0.25,3.325) 31(-0.25,3.325) 32(-0.75,3.325) 33(-1.25,3.325) 34(-1.75,3.325) 35(-2.25,3.325) 36(-2.75,3.325)
  oval 0.66x0.28 smd: 13(3.325,-2.75) 14(3.325,-2.25) 15(3.325,-1.75) 16(3.325,-1.25) 17(3.325,-0.75) 18(3.325,-0.25) 19(3.325,0.25) 20(3.325,0.75) 21(3.325,1.25) 22(3.325,1.75) 23(3.325,2.25) 24(3.325,2.75) 37(-3.325,2.75) 38(-3.325,2.25) 39(-3.325,1.75) 40(-3.325,1.25) 41(-3.325,0.75) 42(-3.325,0.25) 43(-3.325,-0.25) 44(-3.325,-0.75) 45(-3.325,-1.25) 46(-3.325,-1.75) 47(-3.325,-2.25) 48(-3.325,-2.75)
  rect 0.8x0.28 smd: 13(3.515,-2.75) 14(3.515,-2.25) 15(3.515,-1.75) 16(3.515,-1.25) 17(3.515,-0.75) 18(3.515,-0.25) 19(3.515,0.25) 20(3.515,0.75) 21(3.515,1.25) 22(3.515,1.75) 23(3.515,2.25) 24(3.515,2.75) 37(-3.515,2.75) 38(-3.515,2.25) 39(-3.515,1.75) 40(-3.515,1.25) 41(-3.515,0.75) 42(-3.515,0.25) 43(-3.515,-0.25) 44(-3.515,-0.75) 45(-3.515,-1.25) 46(-3.515,-1.75) 47(-3.515,-2.25) 48(-3.515,-2.75)
  silkscreen extent -4.27,-3.58 3.55,3.55
SO-G6/E2.4 [mm] "Small Outline; 6 Leads; Body 3.6 x 3.6 mm, inc. leads (LxW max)"
  rect 0.55x1.45 smd: 1(-0.95,-1.35) 2(0,-1.35) 3(0.95,-1.35) 4(0.95,1.35) 5(0,1.35) 6(-0.95,1.35)
  silkscreen extent -1.7,-1.9 1.55,1.2
SOT-TMP102 [mm] "Plastic Small Outline 1,7x1,7mm Pitch:0.5mm, 6pins"
  rect 0.3x0.6 smd: 1(-0.508,-0.699) 3(0.508,-0.699) 4(0.508,0.699) 6(-0.508,0.698)
  rect 0.34x0.6 smd: 2(0,-0.699) 5(0,0.698)
  silkscreen extent -0.89,-0.44 0.89,0.44
STPS140A [mm] "Power Schottky Rectifier SMA"
  rect 1.65x1.65 smd: 1(-1.825,0)
  rect 2.05x1.65 smd: 2(1.7,0)
  silkscreen extent -2.3,-1.65 2.3,1.65
U.FL [mm] "Ultra small surface mount coaxial connectors"
  rect 1x1 smd: 1(0,-0.825)
  rect 1x2.2 smd: 2(-1.524,0.825) 2(1.524,0.825)
  silkscreen extent -1.52,-0.63 1.52,2.41
VFQFPN8 [mm] "VFQFPN8 (MLP8) 8-lead Very thin Fine Pitch Quad Flat Package No lead,  6 × 5 mm, package outline"
  oval 1.2x0.5 smd: 1(-3,1.905) 2(-3,0.635) 3(-3,-0.635) 4(-3,-1.905) 5(3,-1.905) 6(3,-0.635) 7(3,0.635) 8(3,1.905)
  Top Layer region: -1.651,-1.968 1.749,-1.968 1.749,2.032 -1.651,2.032
  silkscreen extent -4.27,-2.92 3.13,2.92
"YAGEO - CAW431115300245" [mil] "2.45Ghz Ceramic Annennta Yageo"
  rect 40x100 smd: 1(0,0)
  oct 40x100 smd: 2(206.84,-3.06)
  silkscreen extent 26,-53 182,53
"Z1 Expansion Connectors_RC2" [mm] "Expansion Connectors for the Z1 board (RC1)"
  rect 1.7x1.7 hole 1.1: 1(-18.3,13.48) 39(2.02,-11.92)
  round 1.7 hole 1.1: 2(-18.3,16.02) 3(-15.76,13.48) 4(-15.76,16.02) 5(-13.22,13.48) 6(-13.22,16.02) 7(-10.68,13.48) 8(-10.68,16.02) 9(-8.14,13.48) 10(-8.14,16.02) 11(-5.6,13.48) 12(-5.6,16.02) 13(-3.06,13.48) 14(-3.06,16.02) 15(-0.52,13.48) 16(-0.52,16.02) 18(17.26,13.48) 19(14.72,10.94) 20(17.26,10.94) 21(14.72,8.4) 22(17.26,8.4) 23(14.72,5.86) 24(17.26,5.86) 25(14.72,3.32) 26(17.26,3.32) 27(14.72,0.78) 28(17.26,0.78) 29(14.72,-1.76) 30(17.26,-1.76) 31(14.72,-4.3) 32(17.26,-4.3) 33(14.72,-6.84) 34(17.26,-6.84) 35(14.72,-9.38) 36(17.26,-9.38) 37(14.72,-11.92) 38(17.26,-11.92) 40(2.02,-14.46) 41(-0.52,-11.92) 42(-0.52,-14.46) 43(-3.06,-11.92) 44(-3.06,-14.46) 45(-5.6,-11.92) 46(-5.6,-14.46) 47(-8.14,-11.92) 48(-8.14,-14.46) 49(-10.68,-11.92) 50(-10.68,-14.46) 51(-13.22,-11.92) 52(-13.22,-14.46) 53(-15.76,-11.92) 54(-15.76,-14.46)
  rect 1.7x1.7 hole 1.1 mask+0.12: 17(14.72,13.48)
  rect 1.1x1.1 hole 0.7: 55(11.43,-11.43) 60(-1.27,3.81)
  round 1.1 hole 0.7: 56(10.16,-11.43) 57(8.889,-11.43) 58(7.62,-11.43) 59(6.35,-11.43) 61(0,3.81) 62(-1.27,2.54) 63(0,2.54) 64(-1.27,1.27) 65(0,1.27) 66(-1.27,0) 67(0,0)
  rect 2x2 hole 1.2: 68(-18.758,-5.93)
  round 2 hole 1.2: 69(-18.758,7.57)
  silkscreen extent -19.57,-15.73 18.53,17.29
ZX62D-B-5P8 [mm] "Micro B - Standard (Bottom mount), Shell through hole"
  rect 0.45x1.5 smd: 1(-1.3,2.8) 2(-0.65,2.8) 3(0,2.8) 4(0.65,2.8) 5(1.3,2.8)
  rrect50% 2.1x1.9 hole 0.825 slot 1.5 at 90 deg: 6(-3.6,0) 7(3.6,0)
  round 1.35 hole 0.85: 6(-2.425,3) 7(2.425,3)
  rect 1.9x1.9 smd: ""(-1.2,0) ""(1.2,0)
  silkscreen extent -3.7,1.3 3.7,2.78

## Part data
BT1: library part Battery, "Multicell Battery"
C1 C2 C3 C4 C5 C6 C9 C10 C11 C12 C13 C14 C15 C16 C17 C18 C20 C21 C22 C23 C24 C25 C26 C27 C28 C42 C61 C71 C81 C101 C171 C251 C261 C351 C371 C381 C391 C431 C441 C481: "Capacitor (Semiconductor SIM Model)"
C7 C8: library part Cap, "Chip capacitor, 0603, C0G, 50V"
C19: library part "Cap Semi", "Chip capacitor, 0603, Y5V, 10V"
C62: library part "Cap Semi", "Capacitor (Semiconductor SIM Model)"
D1: "Schotkky Diode 1N5820"
DS1: library part "LED RGB", "1208 tricolor right angle"
DS2 DS3 DS4 DS5: library part LED2, "Typical RED, GREEN, YELLOW, AMBER GaAs LED"
JP1: library part MHDR2X3, "Header, 3-Pin, Dual row"
JP2: library part "USB 5 pins"
L1: library part "6.5x2.2 TDMA Antenna", "ANT 2.4GHZ 802.11 BLUETOOTH SMD"
L5: library part DLP11SN900SL2, "Choke Coil Common Mode 150mA SMD"
R1 R2 R3 R4 R5 R6 R7 R8 R9 R10 R11 R12 R13 R14 R15 R16 R17 R18 R19 R20 R21 R22 R23 R24 R25 R26 R451: "Semiconductor Resistor"
S1: library part B3U-1000P, "Ultra-small Tactile Switch"
S2: library part SW-SPST, "Single-Pole, Single-Throw Switch"
U1: "2.4 GHz IEEE 802.15.4 / ZigBee-ready RF Transceiver"
U2: library part LIS302DL, "MEMS motion sensor  3-axis - ±2g/±8g smart digital output “piccolo” accelerometer"
U3: "MIXED SIGNAL MICROCONTROLLER"
U4: library part PIC12F589, "8-Bit CMOS Microcontroller, Program Memory (KB)  1.5,  RAM Bytes  41, Data EEPROM (bytes)  64,  Pin Count  8"
U5: library part M25P80, "8 Mbit, low voltage, serial Flash memory  with 75 MHz SPI bus interface"
U6: library part TMP102, "Low Power Digital Temperature Sensor  With SMBus /Two-Wire Serial Interface in SOT563. Voltage Supply 1.4 V ~ 3.6 V"
U7: "USB-to-Serial Converter from Silicon Laboratories"
U8: library part USBLC6-2SC6, "VERY LOW CAPACITANCE  ESD PROTECTION"
X1: library part AntennaOmnidirectional
Y1: "XTAL 7.2pF Load Capacitance."
Y2: library part XTAL, "Crystal Oscillator"

## Free pads (board coordinates)
  oval 1.2x2 hole 0.55 slot 1.3 at 90 deg: 0(1.03,-26.038) 0(1.03,-22.038) 0(1.03,-18.038) 0(16.27,-26.038) 0(16.27,-22.038) 0(16.27,-18.038)
  oval 2x1.2 hole 0.55 slot 1.3 at 0 deg: 0(4.25,-30.138) 0(13.25,-30.138) 0(13.25,-15.998)
  oval 1.2x1.8 hole 0.55 slot 1.3 at 90 deg: 0(9.231,-14.038)

## Via types
v1: diameter 0.66, hole 0.3, Top Layer to Bottom Layer, 171 vias
v2: diameter 0.66, hole 0.3, Top Layer to Bottom Layer, tented top, 17 vias
v3: diameter 0.66, hole 0.3, Top Layer to Bottom Layer, tented bottom, 1 vias

## Nets (pads, with @x,y where several pads share a name; then routed paths per layer and width w, separated by ;. In a path a pad name is that pad's centre, name@x,y a point inside that pad or via, vN(x,y) a via of type N, cw(c..) or ccw(c..) an arc to the next point about the centre after c; other vN are vias at no path point)
AD_0: R10.2 R20.1 R21.2 U3.59 | length 9.2
  Top Layer w0.15: U3.59@25.61,-14.929 25.61,-13.406 ; R20.1@26.02,-11.318 25.61,-11.728 25.61,-13.406 ; R10.2@26.24,-13.406 25.61,-13.406
  Top Layer w0.2: R20.1@26.02,-11.318 26.02,-10.536 27.388,-9.168 R21.2@29.47,-9.168
AD_1: JP1.16 U3.60 | length 20.7
  Top Layer w0.15: U3.60@25.11,-14.929 25.11,-10.865 28.916,-7.059 31.423,-7.059 32.274,-6.208 34.75,-6.208 35.696,-5.262 35.696,-3.232 JP1.16@36.92,-2.008
AD_2: JP1.9 U3.61 | length 12.3
  Top Layer w0.15: U3.61@24.61,-14.929 24.7,-14.839 24.7,-10.789 29.3,-6.189 JP1.9@29.3,-4.548
AD_3: R12.1 R15.2 U3.2 | length 11.4
  Top Layer w0.15: U3.2@21.26,-17.279 22.028,-17.279 22.285,-17.022 22.285,-16.453 21.93,-16.098 21.93,-10.492 22.62,-9.802 R12.1@22.62,-8.618 ; R12.1@22.82,-8.818 R15.2@22.82,-7.4
AD_4: JP1.7 U3.3 | length 16.3
  Top Layer w0.15: U3.3@21.26,-17.779 22.028,-17.779 22.592,-17.215 22.592,-16.3 22.24,-15.948 22.24,-10.729 26.76,-6.209 JP1.7@26.76,-4.548
AD_5: JP1.10 U3.4 | length 20.4
  Top Layer w0.15: U3.4@21.251,-18.288 22.03,-18.288 22.893,-17.425 22.893,-16.161 22.55,-15.818 22.55,-10.855 28.036,-5.369 28.036,-3.272 JP1.10@29.3,-2.008
AD_6: JP1.8 U3.5 | length 21.9
  Top Layer w0.15: U3.5@21.26,-18.779 20.431,-18.779 20.233,-18.581 20.233,-15.211 19.71,-14.688 19.71,-12.608 20.75,-11.568 20.75,-8.018 23.11,-5.658 23.11,-3.848 23.67,-3.288 25.48,-3.288 JP1.8@26.76,-2.008
AD_7: JP1.6 U3.6 | length 20.5
  Top Layer w0.15: U3.6@21.26,-19.279 20.443,-19.279 19.923,-18.759 19.923,-15.386 19.404,-14.867 19.404,-12.487 20.45,-11.44 20.45,-7.888 22.76,-5.578 22.76,-3.468 JP1.6@24.22,-2.008
ADC+3V: C4.2 C5.2 C6.1 C22.1 C23.2 JP1.4 JP1.14 L10.1 R22.2 U2.6 U3.64 | length 15.6
  Top Layer w0.3: U3.64@23.11,-14.929 C6.1@23.112,-13.378 ; R22.2@36.487,-9.618 38.965,-9.618 ; C23.2@38.7,-7.308 39.016,-7.308 39.437,-7.729 39.437,-9.146 38.965,-9.618 ; L10.1@38.983,-10.218 38.965,-10.2 38.965,-9.618
  Top Layer w0.5: C6.1@23.112,-13.378 v1(23.112,-12.472) v1(23.112,-11.336) C22.1@23.939,-10.509 ; U2.6@34.87,-8.318 34.87,-7.683 35.735,-6.818 v1@38.674,-6.818
  other v1: 38.717,-6.818
ADCGND: C4.1 C5.1 C6.2 C22.2 C23.1 C27.1 JP1.1 JP1.2 JP1.11 JP1.12 L8.1 R11.1 R12.2 R20.2 U2.4 U2.5 U2.10 U2.11 U2.12 U3.11 U3.62 | length 25.5
  Top Layer w0.15: 19.1,-12.431 19.1,-15.038 19.4,-15.338 C27.1@19.4,-15.93
  Top Layer w0.2: v1(18.6,-12.218) 18.6,-12.053 18.945,-11.708 ; 29.964,-10.718 U2.11@32.184,-10.718 ; U2.12@32.184,-11.518 31.299,-11.518 30.888,-11.107 30.888,-10.315 31.285,-9.918 U2.10@32.184,-9.918 ; U2.4@34.87,-9.918 35.634,-9.918 35.811,-9.741 35.811,-9.055 ; U2.5@34.87,-9.118 35.756,-9.118 36.359,-8.515
  Top Layer w0.3: U3.11@21.26,-21.779 22.134,-21.779 24.559,-19.354 24.559,-16.401 24.11,-15.952 U3.62@24.11,-14.929 C6.2@24.112,-13.378 ; R11.1@26.24,-12.395 R20.2@27.19,-11.445
  other v1: 24.573,-16.398 28.77,-12.348 24.113,-11.932 29.5,-10.798 21.55,-9.648 25.96,-8.568 37.6,-8.55 19.31,-6.278 28.23,-6.128 25.46,-6.018 40.354,-4.483 37.75,-3.238
ALERT: JP1.41 U3.27 U6.3 | length 22.4
  Top Layer w0.2: v1(35.85,-20.008) U6.3@36.59,-20.008
  Top Layer w0.3: U3.27@28.11,-26.129 v1(28.11,-24.043)
  MidLayer1 w0.15: v1(35.85,-20.008) 36.84,-20.998 JP1.41@36.84,-29.948
  MidLayer2 w0.15: v1(28.11,-24.043) 28.765,-24.043 28.887,-23.921 33.225,-23.921 33.604,-23.542 35.684,-23.542 v1(36.73,-24.588)
BSL_RX: JP1.47 R19.2 U3.22 | length 15.6
  Top Layer w0.15: U3.22@25.61,-26.129 25.61,-27.508 26.476,-28.374 27.146,-28.374 28.72,-29.948 JP1.47@29.3,-29.948
  Top Layer w0.3: U3.22@25.61,-26.129 v1(25.61,-24.918)
  Top Layer w0.5: v1@32.71,-25.371 R19.2@33.5,-25.371
  MidLayer2 w0.15: v1(25.61,-24.918) 26.303,-25.611 30.701,-25.611 30.934,-25.378 v1(32.71,-25.378)
BSL_TX: JP1.53 R18.2 U3.13 | length 20.8
  Top Layer w0.15: U3.13@21.26,-22.779 22.028,-22.779 22.3,-23.051 22.3,-26.163 22.09,-26.373 22.09,-28.178 21.68,-28.588 JP1.53@21.68,-29.948
  MidLayer2 w0.15: v1@22.08,-26.373 31.998,-26.373 32.197,-26.174 v1(34.521,-26.174)
  other v1: 22.08,-26.383
CC11: U1.11
CC12: U1.12
CC13: U1.13
CC16: U1.16
CC36: U1.36
CC40: U1.40
CC46: U1.46
CC47: U1.47
"CERAMIC ANTENNA": C62.3 L1.1 | length 5
  Top Layer w0.278: L1.1@5.57,-8.618 5.864,-8.912 C62.3@5.864,-13.465
CPCTS: R23.1 U7.23 | length 1
  Top Layer w0.15: U7.23@47.06,-20.592 R23.1@48.083,-20.592
CPD+3.3V: C10.2 C12.1 D1.1 DS4.1 DS5.1 JP1.20 R14.1 R16.1 U5.3 U7.6 | length 71.2
  Top Layer w0.3: D1.1@41.962,-12.772 R16.1@43.659,-12.772 ; R14.1@43.3,-15.813 43.711,-15.402 C10.2@43.711,-15.137 ; U7.6@43.462,-16.74 R14.1@43.462,-16.084 ; R16.1@43.687,-12.8 43.692,-12.805 C10.2@43.692,-14.638 ; v1@47.28,-15.818 DS5.1@48.09,-15.008 ; DS5.1@48.37,-14.631 48.37,-13.9 48.699,-13.571 49.444,-13.571 49.77,-13.897 DS4.1@49.77,-14.618
  Top Layer w0.5: D1.1@41.406,-13.057 41.9,-12.563 v1@41.9,-11.472
  MidLayer1 w0.3: v1@41.9,-11.472 41.9,-10.693 43.48,-9.113 48.855,-9.113 49.59,-8.378 53.41,-8.378 JP1.20@54.7,-7.088
  MidLayer2 w0.15: v1(13.95,-8.641) 13.95,-13.069 14.57,-13.689 14.57,-14.121 14.972,-14.523 15.7,-14.523 16.061,-14.162 18.652,-14.162 19.418,-14.928 25.893,-14.928 26.403,-14.418 31.3,-14.418 31.486,-14.232 32.666,-14.232 33.85,-13.048 41.032,-13.048 41.632,-12.448 47.1,-12.448 48.076,-13.424 48.076,-15.022 v1@47.28,-15.818 ; 41.9,-12.448 v1(41.9,-11.458)
  other v1: 47.29,-15.818
CPDCD: R24.1 U7.1 | length 7.7
  Top Layer w0.3: U7.1@45.96,-16.992 45.96,-17.221 v1(47.29,-17.221) ; R24.1@47.07,-23.244 v1(47.07,-21.871)
  MidLayer1 w0.2: v1(47.07,-21.871) 47.07,-18.331 47.29,-18.111 v1(47.29,-17.221)
CPDGND: C10.1 C12.2 C15.2 C17.2 C18.2 C19.2 JP1.18 L6.1 L9.1 R16.2 U7. U7.3 | length 11.2
  Top Layer w0.2: C19.2@39.256,-17.532 39.281,-17.532 L9.1@40.4,-16.413 ; 44.502,-12.649 44.502,-13.51 C12.2@44.692,-13.7
  Top Layer w0.254: C15.2@41.192,-7 C15.2@41.289,-7 ; 42.737,-8.448 42.743,-8.448
  Top Layer w0.3: C19.2@39.256,-17.598 39.256,-18.395 C18.2@39.614,-18.753 C17.2@39.614,-19.632
  Top Layer w0.4: v1(43.006,-11.458) 43.78,-11.458 L6.1@43.78,-10.268
  MidLayer1 w0.254: 51.025,-5.779 53.469,-5.779 JP1.18@54.7,-4.548
  other v1: 43.458,-20.466 44.458,-20.466 45.458,-20.466 41.293,-15.731
CPDSR: R25.1 U7.27 | length 7.7
  Top Layer w0.3: U7.27@47.06,-18.592 v1@48.164,-18.592 ; v1(49.17,-24.031) R25.1@49.17,-23.244
  MidLayer1 w0.2: v1(48.18,-18.608) 48.18,-23.041 v1(49.17,-24.031)
CPDTR: JP1.59 U4.6 U7.28 | length 19
  Top Layer w0.15: U7.28@47.07,-18.052 v1(48.886,-18.052)
  Top Layer w0.2: v1@44.79,-24.128 44.79,-24.921 45.162,-25.293 U4.6@45.65,-25.293
  MidLayer1 w0.2: JP1.59@43.79,-29.458 43.79,-26.808 44.79,-25.808 v1(44.79,-24.031) 44.79,-23.381 45.4,-22.771 47.01,-22.771 47.79,-21.991 47.79,-20.411 47.48,-20.101 47.48,-18.471 47.98,-17.971 48.805,-17.971 v1(48.886,-18.052)
CPNC9: U7.9
CPNC10: U7.10
CPNC11: U7.11
CPNC12: U7.12
CPNC13: U7.13
CPNC14: U7.14
CPNC15: U7.15
CPNC16: U7.16
CPNC17: U7.17
CPNC18: U7.18
CPNC19: U7.19
CPNC20: U7.20
CPNC21: U7.21
CPNC22: U7.22
CPRI: R26.1 U7.2 | length 10.3
  Top Layer w0.3: U7.2@45.46,-16.992 45.46,-16.331 45.7,-16.091 46.28,-16.091 v1(46.65,-16.461) ; R26.1@49.17,-22.444 49.17,-21.731 v1(49.18,-21.721)
  MidLayer1 w0.3: v1(46.65,-16.461) 47.442,-16.461 48.14,-17.159 48.918,-17.159 49.517,-17.758 49.517,-18.431 49.18,-18.768 v1(49.18,-21.721)
CPRTS: U4.3 U7.24 | length 7.9
  Top Layer w0.15: U7.24@47.06,-20.092 48.441,-20.092 49.77,-21.421 49.77,-24.568 49.045,-25.293 U4.3@48.55,-25.293
CPRXD: JP1.37 R4.2 R18.1 U3.32 U7.25 | length 36.8
  Top Layer w0.15: U7.25@47.06,-19.592 48.918,-19.592 R4.2@48.97,-19.644 48.97,-20.046 50.141,-21.217 50.141,-24.5 50.554,-24.913 50.554,-26.693 50.958,-27.097 50.958,-28.746 JP1.37@52.16,-29.948
  Top Layer w0.3: U3.32@30.61,-26.038 32.057,-26.038 32.704,-26.685 R18.1@33.5,-26.685 ; v1(34.643,-27.952) R18.1@33.5,-26.809 ; R18.1@33.5,-26.809 R18.1@33.5,-26.685 ; R18.1@33.5,-26.809 R18.1@33.5,-26.685
  MidLayer2 w0.15: v1(34.643,-27.952) 50.175,-27.952 JP1.37@52.087,-29.864
CPTXD: JP1.35 R3.2 R19.1 U3.33 U7.26 | length 34.7
  Top Layer w0.15: U3.33@32.41,-24.279 U3.33@32.41,-24.238 ; U3.33@32.451,-24.279 U3.33@32.456,-24.284 ; U3.33@32.46,-24.279 33.891,-24.279 v1(34.07,-24.458) 34.488,-24.876 R19.1@34.488,-25.359 ; U7.26@47.06,-19.092 47.136,-19.168 48.583,-19.168 48.92,-18.831 R3.2@49.683,-18.831 ; R3.2@49.56,-18.831 49.56,-20.083 50.491,-21.014 50.491,-24.414 50.861,-24.784 50.861,-26.109 JP1.35@52.16,-27.408
  MidLayer2 w0.15: v1(34.07,-24.458) 35.282,-24.458 37.568,-26.744 51.56,-26.744 JP1.35@52.26,-27.444
D+1.8V: C11.2 C42.1 C101.2 C171.1 C261.1 C351.1 C371.1 C441.1 C481.1 U1.1 U1.2 U1.3 U1.4 U1.10 U1.14 U1.15 U1.17 U1.18 U1.20 U1.26 U1.35 U1.37 U1.42 U1.44 U1.48 | length 34.1
  Top Layer w0.15: C101.2@2.422,-21.248 2.924,-21.248 ; v1(3.21,-18.8) 3.871,-18.8 4.101,-18.57 5.081,-18.57 5.361,-18.85 U1.10@5.36,-19.27 ; C261.1@4.082,-28.848 4.12,-28.81 v1(4.12,-27.758) 4.12,-27.308 4.443,-26.986 4.622,-26.986 4.79,-26.818 U1.26@4.79,-26.3 ; U1.44@10.625,-22.035 10.995,-22.035 11.641,-21.389 11.641,-18.69 v1(11.841,-18.49)
  Top Layer w0.2: C11.2@2.341,-23.268 2.931,-23.268 ; U1.20@3.591,-23.54 3.002,-23.54 2.931,-23.469 2.931,-23.268 ; U1.18@3.595,-22.535 3.116,-22.535 2.931,-22.72 2.931,-23.268 ; U1.17@3.595,-22.035 3.156,-22.035 2.924,-21.803 2.924,-21.035 ; U1.15@3.595,-21.035 2.924,-21.035 ; U1.14@3.595,-20.535 3.156,-20.535 2.924,-20.768 2.924,-21.035 ; U1.4@8.36,-19.27 8.361,-18.85 8.819,-18.392 v1@9.361,-18.392 ; U1.3@8.86,-19.27 v1@8.861,-18.392 ; U1.2@9.36,-19.27 v1@9.361,-18.392 ; U1.1@9.851,-19.265 9.851,-18.682 9.561,-18.392 v1@9.361,-18.392 ; C171.1@10.032,-17.768 10.032,-18.14 v1(10.62,-18.728) U1.48@10.62,-20.035
  Top Layer w0.23: C371.1@10.152,-27.492 10.152,-27.086 10.521,-26.717 v1(10.521,-26.32) U1.37@10.521,-25.535 ; U1.42@10.625,-23.035 11.276,-23.035 12.466,-21.845 C42.1@12.466,-21.214
  Top Layer w0.25: U1.35@9.36,-26.3 9.361,-27.219 9.634,-27.492 C371.1@10.152,-27.492
  Top Layer w0.3: C351.1@2.34,-18.8 v1(3.21,-18.8) ; v1(11.841,-18.49) C441.1@11.841,-17.768
  Top Layer w0.5: C11.2@2.33,-23.257 v1(2.33,-22.298) C101.2@2.33,-21.568 ; v1@9.127,-18.081 C481.1@9.127,-17.768
  other v1: 13.526,-21.183 13.526,-20.443 9.127,-18.38